# EAGLE board Motor_Driver (EAGLE 9.6.2)
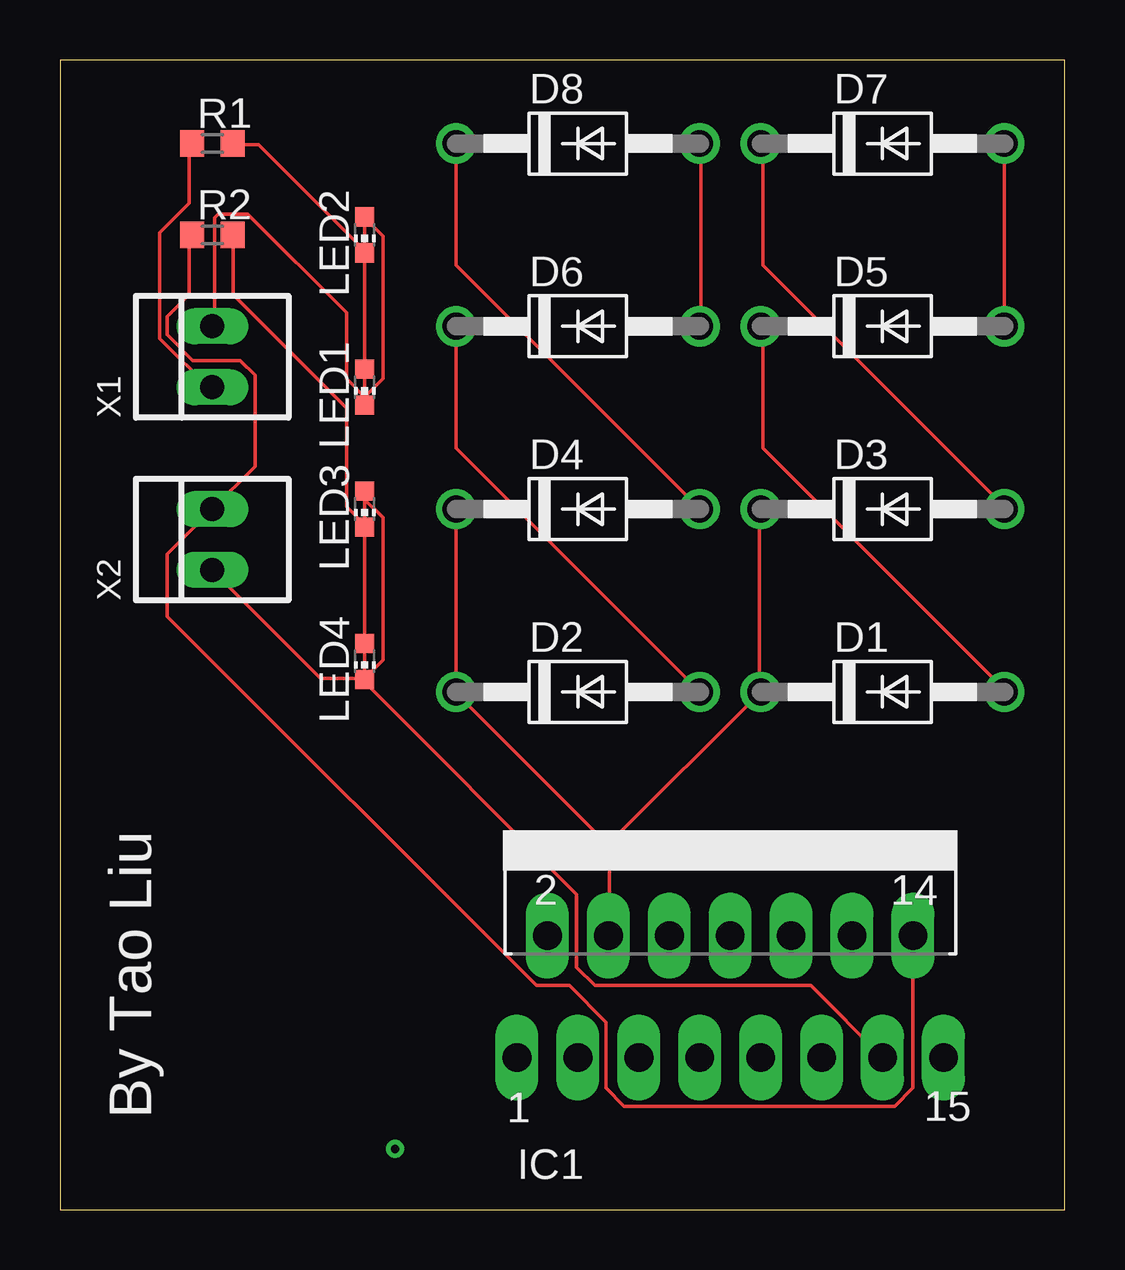
[diagram p0: board, top side]
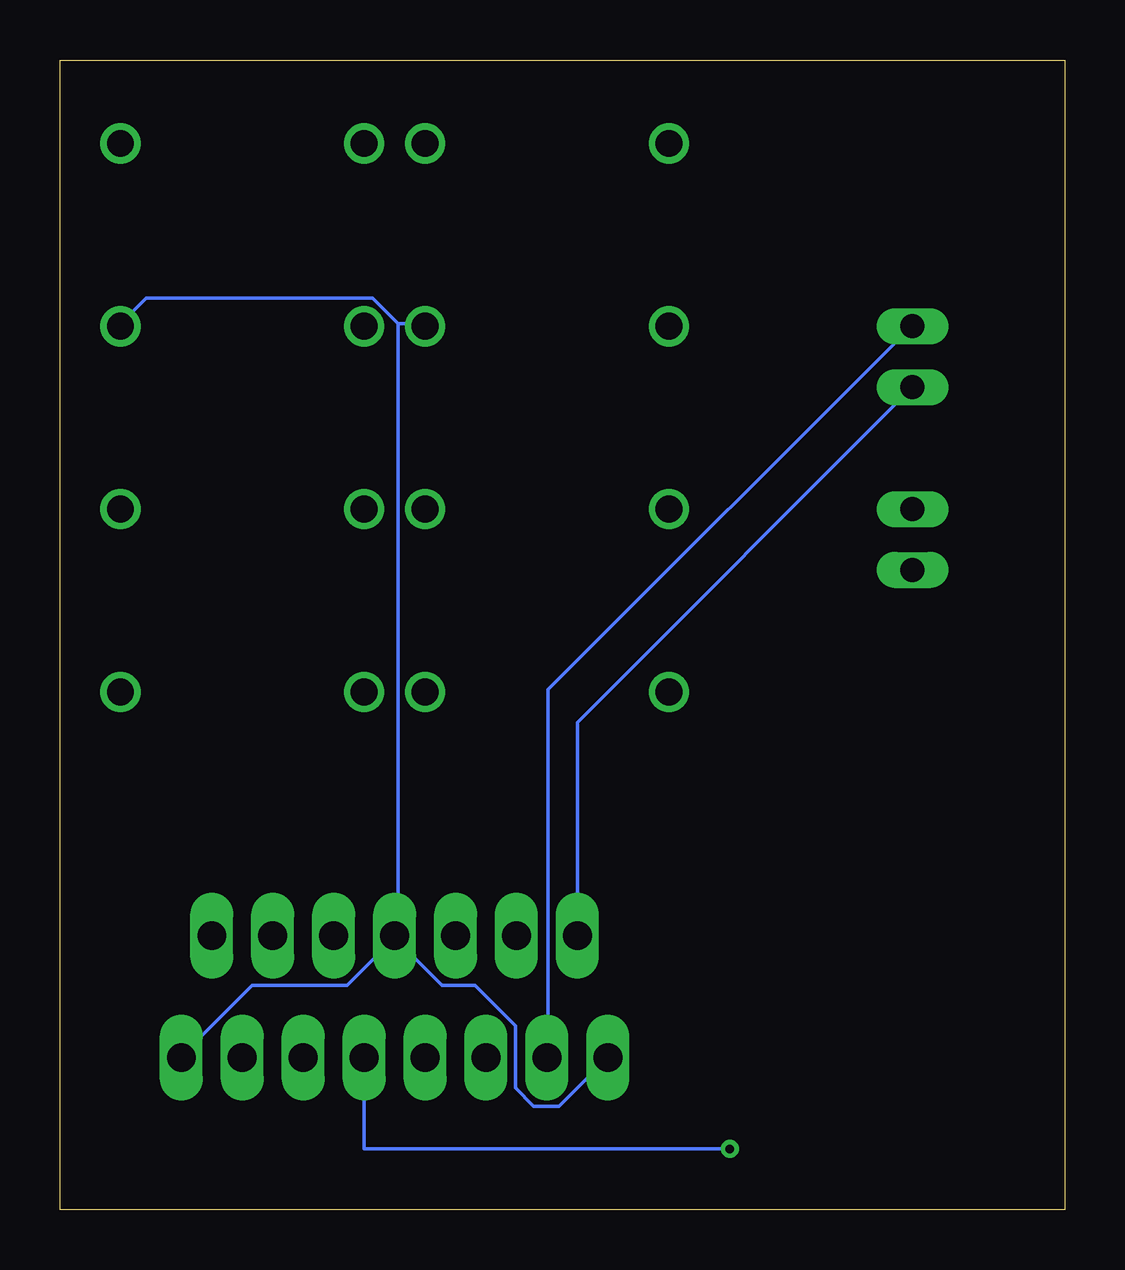
[diagram p1: board, bottom side, seen from below]

Size 41.89 x 47.93 mm. Coordinates in mm from the lower left corner, seen from the top.
Outline: 0,0 41.89,0 41.89,47.93 0,47.93 0,0
Copper layers (1*16): Top 0.035mm / dielectric 1.5mm / Bottom 0.035mm
Design rules "default": minimum track width 6mil, minimum drill 0.35mm, track to track 6mil, track to pad 6mil, pad to pad 6mil, via to via 6mil, smd to smd 6mil, copper to edge 40mil, drill to drill 6mil, minimum pad ring 10mil, minimum via ring 8mil, stop-mask expansion 4mil, vias tented up to drill 0mil, thermal gap 10mil

## Footprints (pad centres in the part's own frame; a part is rotated, then mirrored left to right if it is on the bottom)
DO41-10 = drill 1.118: A 5.08,0; C -5.08,0
MULTIWATT-15 = drill 1.2 long: 1 -8.89,-7.62; 2 -7.62,-2.54; 3 -6.35,-7.62; 4 -5.08,-2.54; 5 -3.81,-7.62; 6 -2.54,-2.54; 7 -1.27,-7.62; 8 0,-2.54; 9 1.27,-7.62; 10 2.54,-2.54; 11 3.81,-7.62; 12 5.08,-2.54; 13 6.35,-7.62; 14 7.62,-2.54; 15 8.89,-7.62
CHIP-LED0603 = smd 0.8 x 0.8: A 0,-0.75; C 0,0.75
R0603 = smd 1 x 1.1: 1 -0.85,0; 2 0.85,0
22-23-2021 = drill 1 long: 1 -1.27,0; 2 1.27,0

## Placement (x,y rotation side)
D1  1N4004  [DO41-10]  34.29,21.59 0 top
D2  1N4004  [DO41-10]  21.59,21.59 0 top
D3  1N4004  [DO41-10]  34.29,29.21 0 top
D4  1N4004  [DO41-10]  21.59,29.21 0 top
D5  1N4004  [DO41-10]  34.29,36.83 0 top
D6  1N4004  [DO41-10]  21.59,36.83 0 top
D7  1N4004  [DO41-10]  34.29,44.45 0 top
D8  1N4004  [DO41-10]  21.59,44.45 0 top
IC1  L298  [MULTIWATT-15]  27.94,13.97 0 top
LED1  [CHIP-LED0603]  12.7,34.29 180 top
LED2  [CHIP-LED0603]  12.7,40.64 180 top
LED3  [CHIP-LED0603]  12.7,29.21 180 top
LED4  [CHIP-LED0603]  12.7,22.86 180 top
R1  [R0603]  6.35,44.45 0 top
R2  [R0603]  6.35,40.64 0 top
X1  22-23-2021  [22-23-2021]  6.35,35.56 90 top
X2  22-23-2021  [22-23-2021]  6.35,27.94 90 top

## Library data of the parts
D1-D8 = diode
IC1 = st-microelectronics; MPN: L298N; OC_FARNELL: 1589425; OC_NEWARK: 32M1527
LED1-LED4 = led
R1 R2 = rcl; SPICEPREFIX: R
X1 X2 = con-molex; MF: MOLEX; MPN: 22-23-2021; OC_FARNELL: 1462926; OC_NEWARK: 25C3832

## Nets
ENA: IC1.6
ENB: IC1.11
GND: D5.A D6.A D7.A D8.A IC1.1 IC1.8 IC1.15
IN1: IC1.5
IN2: IC1.7
IN3: IC1.10
IN4: IC1.12
N$6: D1.C D2.C D3.C D4.C IC1.4
N$7: D1.A D5.C
N$8: D2.A D6.C
N$9: D3.A D7.C
N$10: D4.A D8.C
N$11: IC1.2 R1.1 X1.1
N$12: LED1.C LED2.A R1.2
N$13: IC1.3 LED1.A LED2.C X1.2
N$14: LED3.A LED4.C R2.2
N$15: IC1.14 R2.1 X2.2
N$16: IC1.13 LED3.C LED4.A X2.1
VCC: IC1.9

## Tracks (layer width: path | path; a pad name or v marks a point on that pad's centre or on a via)
GND
  Top 0.152: D6.A 26.72,36.93 26.72,44.4 D8.A | D7.A D5.A
  Bottom 0.152: 27.79,36.93 26.72,36.93 D6.A | 27.79,36.93 28.85,38 38.3,38 39.37,36.93 D5.A | IC1.1 21.08,4.32 22.15,4.32 22.91,5.08 22.91,7.67 24.59,9.35 25.96,9.35 27.94,11.33 | 27.94,11.33 29.92,9.35 33.88,9.35 36.78,6.45 IC1.15 | 27.94,11.33 IC1.8 27.94,11.48 27.79,11.63 27.79,36.93
N$6
  Top 0.152: D4.C D2.C 16.51,21.54 22.91,15.14 | D3.C 29.16,29.16 29.16,21.69 D1.C 22.91,15.29 22.91,15.14 | 22.91,15.14 22.91,11.48 IC1.4
N$7
  Top 0.152: D5.C 29.31,36.78 29.31,31.75 39.37,21.69 D1.A
N$8
  Top 0.152: D6.C 16.51,31.75 D2.A
N$9
  Top 0.152: D7.C 29.31,44.4 29.31,39.37 39.37,29.31 D3.A
N$10
  Top 0.152: D8.C 16.51,39.37 D4.A
N$11
  Top 0.152: R1.1 5.38,44.4 5.38,41.96 4.17,40.74 4.17,36.32 6.3,34.19 X1.1
  Bottom 0.152: IC1.2 20.32,20.32 X1.1
N$12
  Top 0.152: LED1.C LED2.A 12.7,39.98 8.28,44.4 7.21,44.4 R1.2
N$13
  Top 0.152: 12.7,33.88 LED1.A 12.7,33.58 | 12.7,33.88 13.46,34.65 13.46,40.59 12.7,41.35 LED2.C | 12.7,33.88 11.94,34.65 11.94,37.39 7.82,41.5 6.6,41.5 6.45,41.35 6.45,36.93 X1.2
  Bottom 0.152: IC1.3 21.54,6.45 21.54,21.69 6.45,36.78 X1.2
N$14
  Top 0.152: LED4.C LED3.A 12.7,28.55 11.94,29.31 11.94,33.43 7.21,38.15 7.21,40.59 R2.2
N$15
  Top 0.152: R2.1 5.38,40.59 5.38,38.15 4.47,37.24 4.47,36.47 5.54,35.41 7.52,35.41 8.13,34.8 8.13,30.99 X2.2 4.47,27.33 4.47,24.74 19.86,9.35 21.23,9.35 22.76,7.82 22.76,5.08 23.52,4.32 34.8,4.32 35.56,5.08 IC1.14
N$16
  Top 0.152: 12.7,22.15 10.87,22.15 X2.1 | LED3.C 12.7,29.62 13.46,28.85 13.46,22.91 12.7,22.15 | 12.7,22.15 LED4.A 12.7,22 21.54,13.16 21.54,10.11 22.3,9.35 31.29,9.35 IC1.13
VCC  (via drill 0.35)
  Bottom 0.152: IC1.9 29.21,2.54 v13.97,2.54

## Text on the board
tNames: By Tao Liu